# Altium PCB mach nuoi trong.PcbDoc
Units mil, origin at the board's own origin, x right, y up, seen from the top; angles counter-clockwise.
Board outline 3890 x 2890 mil, 2 copper layers (Top Layer, Bottom Layer); 37 components, 41 nets, 155 pads, 4 vias.
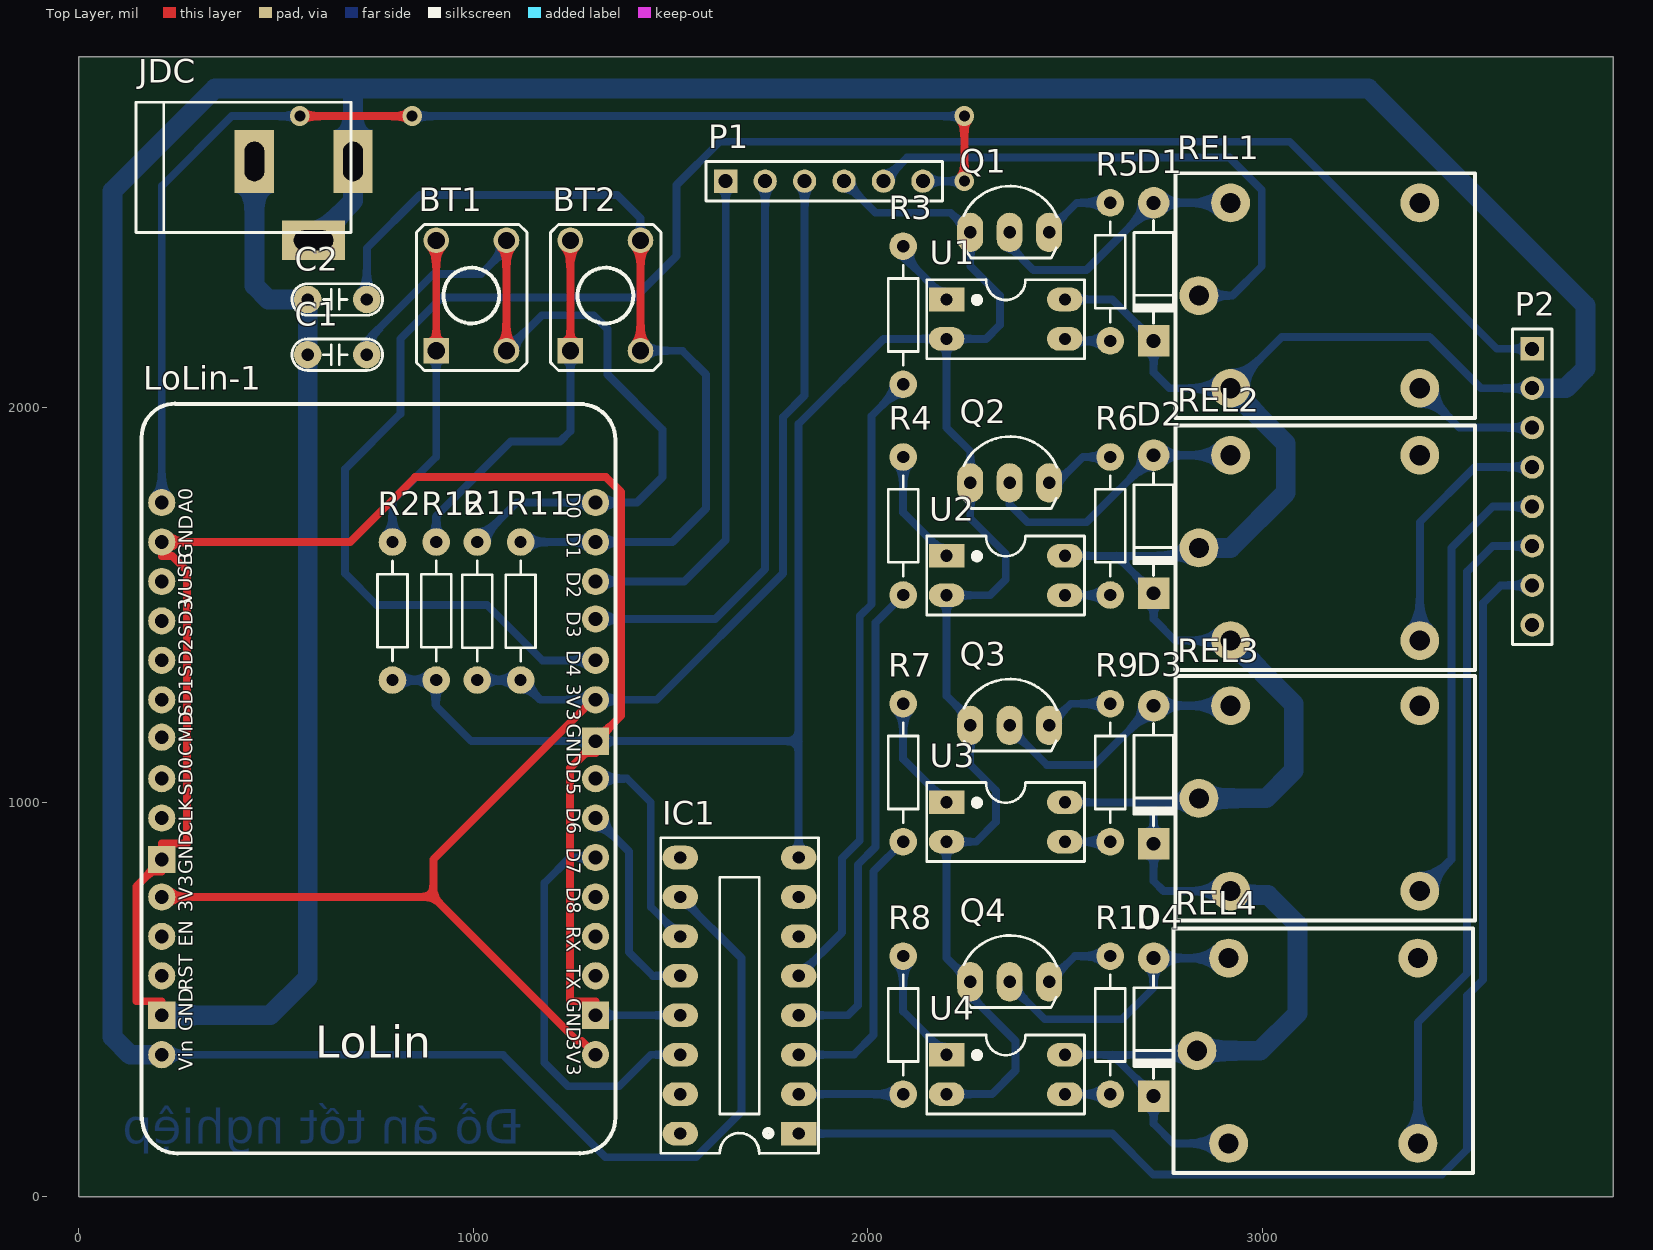
[diagram p0: Top Layer view]
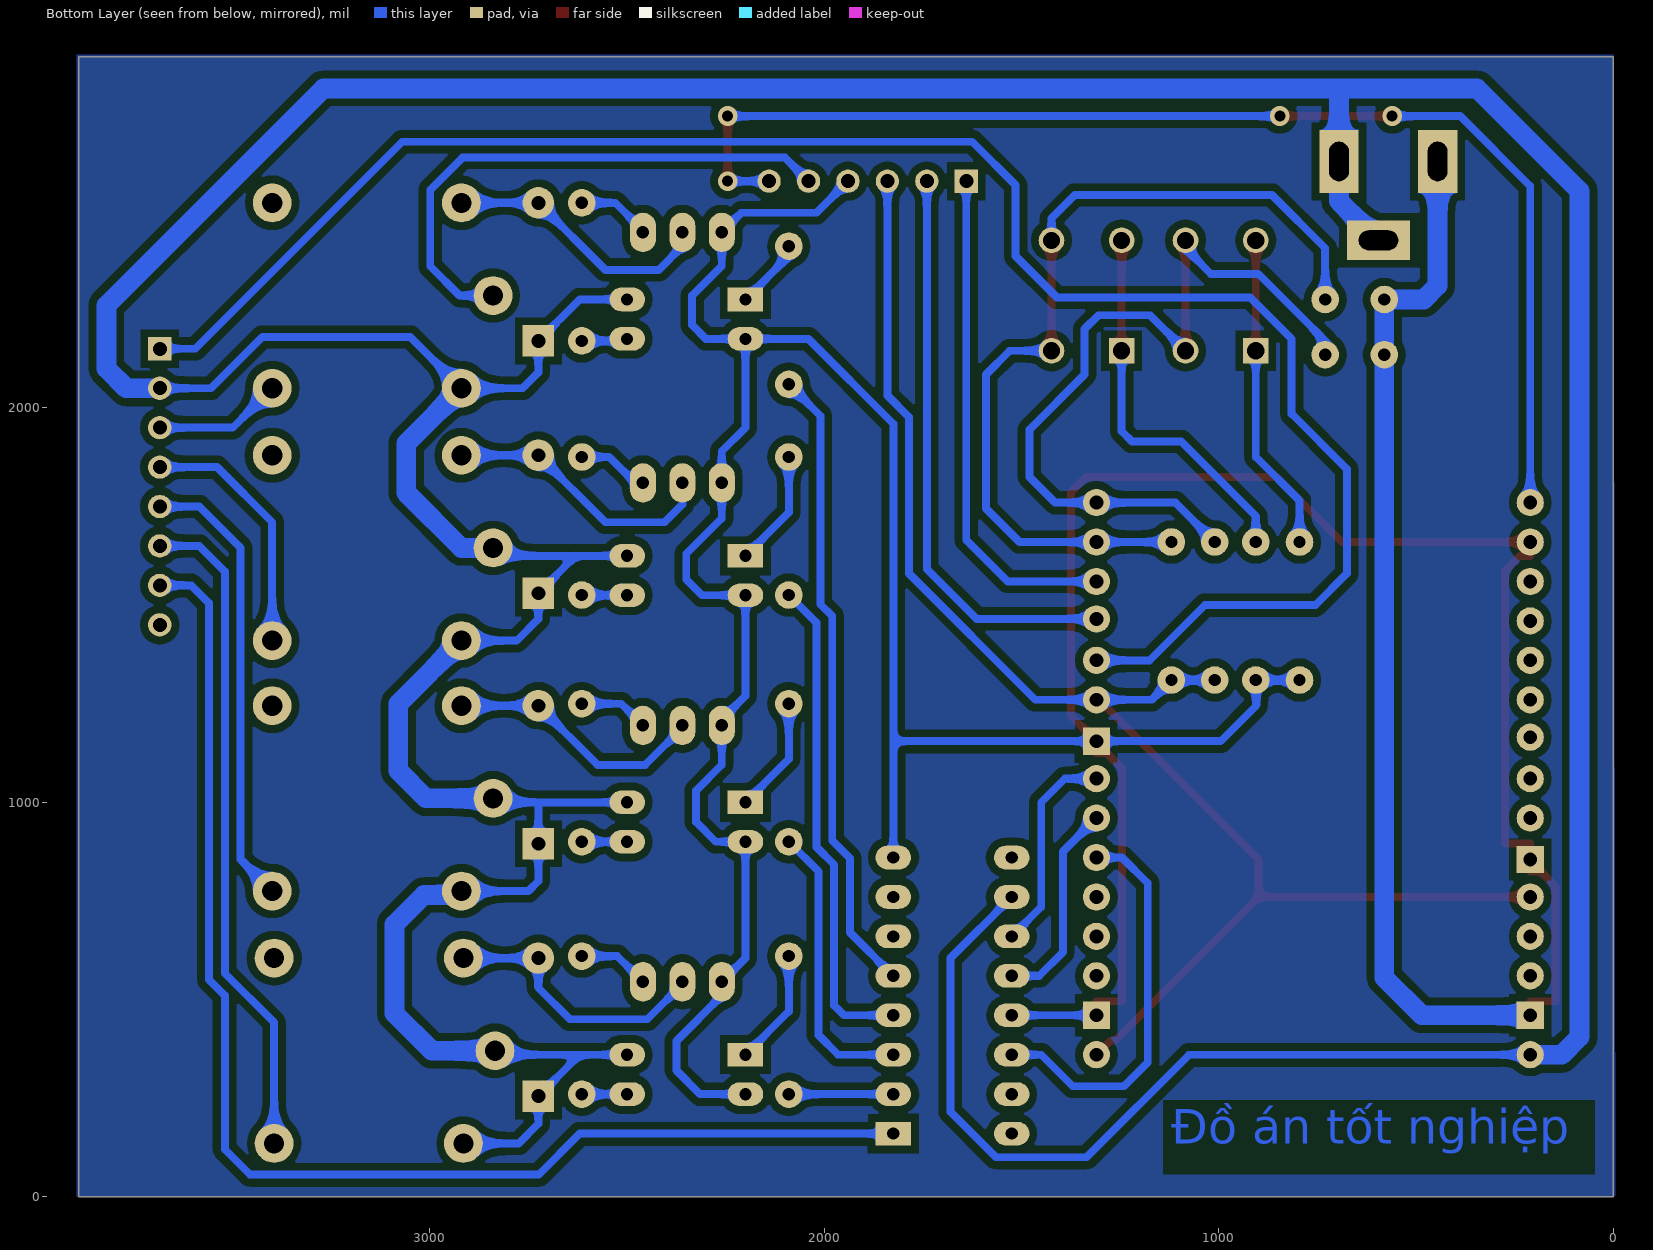
[diagram p1: Bottom Layer view, seen from below]
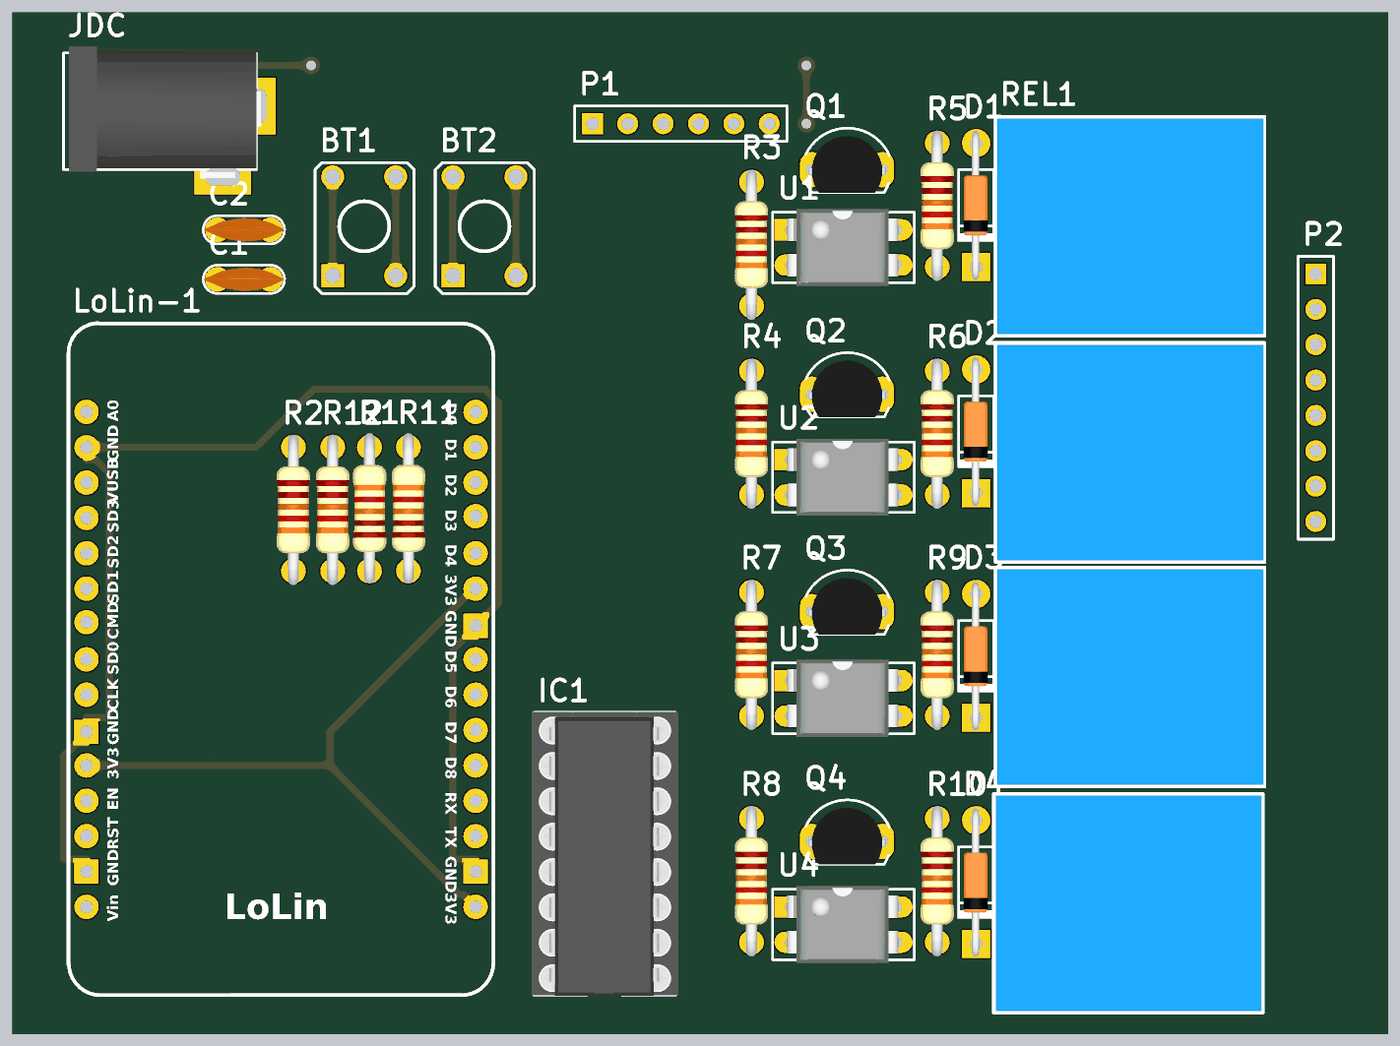
[diagram p2: 3D render of the assembled board from above, using the file's embedded part models]

## Layer stack, top to bottom
Top Solder: solder mask 0.4, Solder Resist, Dk 3.5
Top Layer: signal copper 1.4
Dielectric 1: dielectric 12.6, FR-4, Dk 4.8
Bottom Layer: signal copper 1.4
Bottom Solder: solder mask 0.4, Solder Resist, Dk 3.5

## Board outline
0,0 3890,0 3890,2890 0,2890

## Design rules (kind name [scope] priority, off if disabled: settings)
Clearance [All] p1: gap=20 ignorepadtopadclearanceinfootprint=FALSE
PolygonConnect [All] p1: connectstyle=Relief reliefconductorwidth=10 reliefentries=4 polygonreliefangle="90 Angle" airgapwidth=10
RoomDefinition sdnl [InComponentClass('sdnl')] p1: confinementstyle=ConfineIn formatcopy=TRUE lockcomponents=FALSE outline -8180,-4205 -6180,-4205 -6180,-3205 -8180,-3205
RoutingVias [All] p1: holewidth=20 width=35 viastyle="Through Hole" minholewidth=15 minwidth=25 maxholewidth=28 maxwidth=50
SolderMaskExpansion [All] p1: expansion=4
Width [All] p1: maxlimit=50 minlimit=10 preferedwidth=20
30 further rules are at their usual default settings.

## Components (designator, comment, footprint, x,y, rotation, side; value= is the part's Value field where it differs from the comment)
BT1 "BUTTON" "button 4 pin" 995,2285 r90 top
BT2 "BUTTON" "button 4 pin" 1335,2285 r90 top
C1 "103" CN1.5 580,2135 r0 top value=0.01uF
C2 "103" CN1.5 580,2275 r0 top value=0.01uF
D1 "1N4007" D1A 2725,2520 r90 top
D2 "1N4007" D1A 2725,1880 r90 top
D3 "1N4007" D1A 2725,1245 r90 top
D4 "1N4007" D1A 2725,605 r90 top
IC1 "74HC595" DIP16/W0.3 1825,160 r90 top
JDC "Jac DC" DC-IN 570,2525 r0 top
LoLin-1 "NodeMCU V1.0 ESP-12E_1" "LoLin NodeMcu V3" 259,2006 r0 top
P1 "Header 6" HDR1X6 1640,2575 r0 top
P2 "Header 8" HDR1X8 3685,2150 r270 top
Q1 "C1815" QTO-92 2360,2445 r0 top
Q2 "C1815" QTO-92 2360,1810 r0 top
Q3 "C1815" QTO-92 2360,1195 r0 top
Q4 "C1815" QTO-92 2360,545 r0 top
R1 "10k" R1/4W 1010,1660 r270 top value="R1/4W - 1K"
R2 "10k" R1/4W 795,1310 r90 top value="R1/4W - 1K"
R3 "1k" R1/4W 2090,2060 r90 top value="R1/4W - 1K"
R4 "1k" R1/4W 2090,1525.6 r90 top value="R1/4W - 1K"
R5 "1k" R1/4W 2615,2170 r90 top value="R1/4W - 1K"
R6 "1k" R1/4W 2615,1525.6 r90 top value="R1/4W - 1K"
R7 "1k" R1/4W 2090,900 r90 top value="R1/4W - 1K"
R8 "1k" R1/4W 2090,260 r90 top value="R1/4W - 1K"
R9 "1k" R1/4W 2615,900 r90 top value="R1/4W - 1K"
R10 "1k" R1/4W 2615,260 r90 top value="R1/4W - 1K"
R11 "10k" R1/4W 1120,1660 r270 top value="R1/4W - 1K"
R12 "10k" R1/4W 906,1310 r90 top value="R1/4W - 1K"
REL1 "RELAY 5V 10A" "RELAY 5V-10A" 2840,2285 r270 top
REL2 "RELAY 5V 10A" "RELAY 5V-10A" 2840,1645 r270 top
REL3 "RELAY 5V 10A" "RELAY 5V-10A" 2840,1010 r270 top
REL4 "RELAY 5V 10A" "RELAY 5V-10A" 2835,370 r270 top
U1 "PC817" DIP4 2200,2275 r270 top
U2 "PC817" DIP4 2200,1625 r270 top
U3 "PC817" DIP4 2200,1000 r270 top
U4 "PC817" DIP4 2200,360 r270 top

## Footprints (in the part's own frame and the unit in brackets; to place one, negate y for a bottom-side part, rotate by r counter-clockwise, add the part's x,y. Pads: shape width x height; smd on the part's side, far side on the other; paste and mask are expansions set on the pad)
"button 4 pin" [mil] "BUTTON SMORE 280mil x 178mil"
  rect 65x65 hole 43.31: 1(-140,89)
  round 65 hole 43.31: 1(140,89) 2(-140,-89) 2(140,-89)
  silkscreen extent -190,-141 180,139
CN1.5 [mil]
  round 70 hole 31: 1(0,0) 2(150,0)
  silkscreen extent -40,-40 190,40, body extent -40,-33 190,33, height 235
D1A [mil] "Diode 1A, W 100mil, L 350mil"
  round 80 hole 35: 1(0,0)
  rect 80x80 hole 35: 2(-350,0)
  silkscreen extent -305,-50 -45,50, body extent -386,-33 34,36, height 84
DC-IN [mil] "Jac DC input"
  rect 100x160 hole 50 slot 100 at 90 deg: 1(125,100) 2(-125,100)
  rect 160x100 hole 50 slot 100 at 0 deg: 3(25,-100)
  silkscreen extent -425,-80 120,250, body extent -410,-105 134,269, height 434
DIP4 [mil]
  rect 60x90 hole 31: 1(0,0)
  oval 60x90 hole 31: 2(100,0) 3(100,300) 4(0,300)
  silkscreen extent -50,-50 150,350, body extent -59,-10 159,305, height 170
DIP16/W0.3 [mil] "16 PIN, W 300mil, Pin to pin 100mil"
  rect 60x90 hole 31: 1(0,0)
  oval 60x90 hole 31: 2(100,0) 3(200,0) 4(300,0) 5(400,0) 6(500,0) 7(600,0) 8(700,0) 9(700,300) 10(600,300) 11(500,300) 12(400,300) 13(300,300) 14(200,300) 15(100,300) 16(0,300)
  silkscreen extent -50,-50 750,350, body extent -52,-57 752,356, height 299
HDR1X6 [mm] "Connector; Header; 6 Position"
  rect 1.5x1.5 hole 0.9: 1(0,0)
  round 1.5 hole 0.9: 2(2.54,0) 3(5.08,0) 4(7.62,0) 5(10.16,0) 6(12.7,0)
  silkscreen extent -1.27,-1.27 13.97,1.27
HDR1X8 [mm] "Connector; Header; 8 Position"
  rect 1.5x1.5 hole 0.9: 1(0,0)
  round 1.5 hole 0.9: 2(2.54,0) 3(5.08,0) 4(7.62,0) 5(10.16,0) 6(12.7,0) 7(15.24,0) 8(17.78,0)
  silkscreen extent -1.27,-1.27 19.05,1.27
"LoLin NodeMcu V3" [mil]
  round 69 hole 35: 3V3(-49,-1246) 3V3(1051,-1646) 3V3(1051,-746) A0(-49,-246) CLK(-49,-1046) CMD(-49,-841) D0(1051,-246) D1(1051,-346) D2(1051,-446) D3(1051,-541) D4(1051,-646) D5(1051,-946) D6(1051,-1046) D7(1051,-1146) D8(1051,-1246) EN(-49,-1346) GND(-49,-346) RST(-49,-1446) RX(1051,-1346) SD0(-49,-946) SD1(-49,-746) SD2(-49,-646) SD3(-49,-546) TX(1051,-1446) VIN(-49,-1646) VUSB(-49,-446)
  rect 69x69 hole 35: GND(-49,-1546) GND(-49,-1151) GND(1051,-1546) GND(1051,-851)
  silkscreen extent -100,-1896 1101,5
QTO-92 [mil] "TO-92"
  oval 66x100 hole 32: 1(-100,0) 2(0,0) 3(100,0)
  silkscreen extent -117,-65 120,118, body extent -109,-66 109,95, height 245
R1/4W [mil] "R 1/4W, 2 Pin, 350mil"
  round 70 hole 31: 1(0,0) 2(350,0)
  silkscreen extent 48,-38 302,38, body extent -40,-47 386,47, height 111
"RELAY 5V-10A" [mm]
  round 2.5 hole 1.3: 1(0,0) 2(-5.969,14.224) 3(5.969,14.224) 4(-5.969,2.032) 5(5.969,2.032)
  silkscreen extent -7.87,-1.52 7.87,17.78, body extent -7.75,-1.4 7.75,17.7, height 15.3

## Part data
BT1 BT2: library part "BUTTON 4 PIN"
C1 C2: library part CN1.5, "Cap np 682pF => 104pF"
D1 D2 D3 D4: library part D1A, "Diode 1A"
IC1: library part 74595, "8 Bit Serial input - Parallel Output"
JDC: library part DCIN, "Jac DC input"
LoLin-1: "LoLin NodeMCU V3"
P1: "Header, 6-Pin", LatestRevisionDate=17-Jul-2002, LatestRevisionNote="Re-released for DXP Platform.", Publisher="Altium Limited"
Q1 Q2 Q3 Q4: library part C1815_1, "NPN 600mW, ECB", =C2383
R1 R2 R3 R4 R5 R6 R7 R8 R9 R10 R11 R12: library part R1/4W, "Resistor 1/4W"
U1 U2 U3 U4: "Opto Couple", ComponentLink1Description="Digikey Part Link", ComponentLink2Description="Open Datasheet", ComponentLink2URL=H:\LIBRARY\LIBRARY.Datasheet\ds_PC817.pdf, Fc=80Khz, Published=13-April-2009, Publisher="Hoang Nguyen", Vendor=Digikey
P2: LatestRevisionDate=17-Jul-2002, LatestRevisionNote="Re-released for DXP Platform.", Publisher="Altium Limited"

## Via types
v1: diameter 50, hole 28, Top Layer to Bottom Layer, tented both sides, 4 vias

## Nets (pads, with @x,y where several pads share a name; then routed paths per layer and width w, separated by ;. In a path a pad name is that pad's centre, name@x,y a point inside that pad or via, vN(x,y) a via of type N, cw(c..) or ccw(c..) an arc to the next point about the centre after c; other vN are vias at no path point)
3v3: LoLin-1.3V3 P1.3 R1.2 R11.2 | length 3885.9
  Top Layer w20: LoLin-1.3V3@210,760 898.57,760 ; LoLin-1.3V3@1310,360 1274.5,395.5 1263.07,395.5 898.57,760 ; LoLin-1.3V3@1310,1260 1303.57,1260 898.57,855 898.57,760
  Bottom Layer w20: R1.2 R11.2 1170,1260 1310,1260 1465,1260 1785,1580 1785,1976.57 1840,2031.57 P1.3
5Vdc: D1.2 D2.2 D3.2 D4.2 IC1.10 JDC.1 JDC.3 LoLin-1.VIN P2.2 REL1.5 REL2.1 REL2.5 REL3.1 REL3.5 REL4.1 REL4.5 U1.4 U2.4 U3.4 U4.4 | length 15052.6
  Bottom Layer w20: LoLin-1.VIN 1075,360 1335,100 1564.85,100 1680,215.15 1680,605 IC1.10 ; U4.4 2620,360 ; U3.4 2720,1000 ; U2.4 2630,1625 ; U1.4 2620,2275 D1.2 2725,2090 2765,2050 REL1.5 3050,2180 3425,2180 3555,2050 P2.2 ; REL4.1 2825,360 2620,360 ; REL3.1 2830,1000 2720,1000 ; REL2.1 2820,1625 2630,1625 ; REL4.5 2775,135 2725,185 D4.2 2620,360 ; REL3.5@2920,765 REL3.5 2750,775 2725,800 D3.2 2725,995 2720,1000 ; REL2.5 2780,1410 2725,1465 D2.2 2630,1625
  Bottom Layer w50: LoLin-1.VIN 130,360 85,405 85,2550 345,2810 690,2810 ; JDC.3 695,2525 JDC.1 695,2805 690,2810 ; REL4.1 2995,370 3090,465 3090,690 3015,765 REL3.5@2920,765 ; REL3.1 3010,1010 3080,1080 3080,1250 REL2.5 ; REL2.1 2920,1645 3060,1785 3060,1910 REL1.5 ; P2.2 3770,2050 3820,2100 3820,2260 3270,2810 690,2810
A0: LoLin-1.A0 P1.6 | length 3181
  Top Layer w20: v1(560,2740) v1(845,2740) ; v1(2245,2575) v1(2245,2740)
  Bottom Layer w20: LoLin-1.A0 210,2562.43 387.57,2740 v1(560,2740) ; v1(845,2740) v1(2245,2740) ; P1.6 v1(2245,2575)
"BT CLEAN": BT1.2 C1.2 LoLin-1.D0 R1.1 | length 2066
  Top Layer w20: BT1.2@1084,2145 BT1.2@1084,2425
  Bottom Layer w20: C1.2 730,2170 900,2340 1020,2340 1084,2404 BT1.2@1084,2425 ; R1.1 1110,1760 LoLin-1.D0 1415,1760 1480,1825 1480,1945 1340,2085 1340,2200 1305,2235 1174,2235 BT1.2@1084,2145
"BT EAT": BT2.2 C2.2 LoLin-1.D1 R11.1 | length 2276.4
  Top Layer w20: BT2.2@1424,2145 BT2.2@1424,2425
  Bottom Layer w20: C2.2 730,2405 865,2540 1365,2540 1424,2481 BT2.2@1424,2425 ; R11.1 LoLin-1.D1 1505,1660 1590,1745 1590,2085 1530,2145 BT2.2@1424,2145
CLEAN: IC1.4 R4.1 | length 1248.6
  Bottom Layer w20: IC1.4 1950,460 1975,485 1975,841.57 2020,886.57 2020,1455.6 R4.1
CLK: IC1.11 LoLin-1.D5 | length 535.9
  Bottom Layer w20: LoLin-1.D5 1390,1060 1450,1000 1450,735 IC1.11
CON: IC1.12 LoLin-1.D6 | length 530.1
  Bottom Layer w20: LoLin-1.D6 1395,875 1395,620 1455,560 IC1.12
DAD: LoLin-1.D3 P1.2 | length 1465.9
  Bottom Layer w20: LoLin-1.D3 1613.43,1465 1740,1591.57 P1.2
DATA: IC1.14 LoLin-1.D7 | length 1014.9
  Bottom Layer w20: LoLin-1.D7 1245,860 1180,795 1180,340 1240,280 1370,280 1450,360 IC1.14
DHT11: LoLin-1.D2 P1.1 | length 1283.5
  Bottom Layer w20: LoLin-1.D2 1535,1560 1640,1665 P1.1
DIR: IC1.1 P2.7 | length 3310
  Bottom Layer w20: IC1.1 2620,160 2724.21,55.79 3455.79,55.79 3520,120 3520,510.01 3560,550.01 3560,1505 3605,1550 P2.7
DRIVER: LoLin-1.D4 P2.1 | length 4779.1
  Bottom Layer w20: LoLin-1.D4 1175,1360 1035,1500 755,1500 675,1580 675,1845 815,1985 815,2175 920,2280 1410,2280 1515,2385 1515,2565 1625,2675 3070,2675 3595,2150 P2.1
FAN: IC1.3 R7.1 | length 731.8
  Bottom Layer w20: IC1.3 1965,360 2015,410 2015,825 R7.1
GND: C1.1 C2.1 IC1.8 IC1.13 JDC.2 LoLin-1.GND P1.4 Q1.1 Q2.1 Q3.1 Q4.1 R2.1 R12.1 U1.2 U2.2 U3.2 U4.2 | length 12881.4
  Top Layer w20: LoLin-1.GND@210,460 210,495.5 145.5,495.5 145.5,786.72 183.28,824.5 210,824.5 210,855 210,895.5 274.5,895.5 274.5,1586.72 236.72,1624.5 210,1624.5 210,1660 688.08,1660 852.58,1824.5 1336.72,1824.5 1374.5,1786.72 1374.5,1219.5 1310,1155 1310,1124.5 1283.28,1124.5 1245.5,1086.72 1245.5,495.5 1310,495.5 LoLin-1.GND@1310,460
  Bottom Layer w20: R2.1 R12.1@905,1310 ; R12.1 R12.1@905,1310 ; LoLin-1.GND@1310,460 IC1.13 ; IC1.8 1825,1155 ; P1.4 2020,2495 2210,2495 Q1.1 2260,2360 2335,2285 2335,2210 2300,2175 U1.2 ; U4.2 2315,260 2375,320 2375,395 2260,510 Q4.1 2200,605 U3.2 2275,900 2325,950 2325,1030 2260,1095 Q3.1 2260,1210 2200,1270 U2.2 2310,1525 2350,1565 2350,1630 2260,1720 Q2.1 2260,1890 2200,1950 U1.2 ; R12.1@905,1310 905,1245 995,1155 1310,1155 1825,1155 ; 1825,1155 1825,1960 2040,2175 U1.2
  Bottom Layer w50: LoLin-1.GND@210,460 485,460 580,555 C1.1 C2.1 480,2275 445,2310 JDC.2
LIGHT: IC1.5 R3.1 | length 1609.8
  Bottom Layer w20: IC1.5 1935,670 1935,858.14 1980,903.14 1980,1472.17 2010,1502.17 2010,1980 R3.1
NetBT1_1: BT1.1 R2.2 | length 811
  Top Layer w20: BT1.1@906,2145 BT1.1@906,2425
  Bottom Layer w20: R2.2 795,1765 906,1876 BT1.1@906,2145
NetBT2_1: BT2.1 R12.2 | length 979.1
  Top Layer w20: BT2.1@1246,2145 BT2.1@1246,2425
  Bottom Layer w20: R12.2 906,1726 1095,1915 1220,1915 1246,1941 BT2.1@1246,2145
NetD1_1: D1.1 Q1.2 REL1.4 | length 690.3
  Bottom Layer w20: Q1.2 2360,2410 2420,2350 2555,2350 D1.1 REL1.4
NetD2_1: D2.1 Q2.2 REL2.4 | length 704.1
  Bottom Layer w20: Q2.2 2360,1755 2405,1710 2555,1710 D2.1 REL2.4
NetD3_1: D3.1 Q3.2 REL3.4 | length 667.1
  Bottom Layer w20: Q3.2 2360,1188.9 2453.9,1095 2575,1095 D3.1 REL3.4
NetD4_1: D4.1 Q4.2 REL4.4 | length 706.1
  Bottom Layer w20: Q4.2 2360,538.9 2448.9,450 2645,450 2725,530 D4.1 REL4.4
NetQ1_3: Q1.3 R5.2 | length 189
  Bottom Layer w20: Q1.3 2460,2450 2530,2520 R5.2
NetQ2_3: Q2.3 R6.2 | length 182.2
  Bottom Layer w20: Q2.3 2480,1810 2545.6,1875.6 R6.2
NetQ3_3: Q3.3 R9.2 | length 177.8
  Bottom Layer w20: Q3.3 2515,1250 R9.2
NetQ4_3: Q4.3 R10.2 | length 181.9
  Bottom Layer w20: Q4.3 2525,610 R10.2
NetR3_2: R3.2 U1.1 | length 190.6
  Bottom Layer w20: R3.2 2090,2385 U1.1 U1.1@2190,2275
NetR4_2: R4.2 U2.1 | length 296.2
  Bottom Layer w20: R4.2 2090,1735 U2.1
NetR5_1: R5.1 U1.3 | length 117.1
  Bottom Layer w20: U1.3 2505,2170 R5.1
NetR6_1: R6.1 U2.3 | length 115.2
  Bottom Layer w20: U2.3 2614.4,1525 R6.1
NetR7_2: R7.2 U3.1 | length 295.6
  Bottom Layer w20: R7.2 2090,1110 U3.1
NetR8_2: R8.2 U4.1 | length 295.6
  Bottom Layer w20: R8.2 2090,470 U4.1
NetR9_1: R9.1 U3.3 | length 115
  Bottom Layer w20: U3.3 R9.1
NetR10_1: R10.1 U4.3 | length 115
  Bottom Layer w20: U4.3 R10.1
O-CLN: P2.4 REL2.3 | length 643
  Bottom Layer w20: REL2.3 3400,1710 3540,1850 P2.4
O-FAN: P2.5 REL3.3 | length 1151.6
  Bottom Layer w20: REL3.3 3480,855 3480,1645 3585,1750 P2.5
O-LIG: P2.3 REL1.3 | length 326.4
  Bottom Layer w20: REL1.3 3500,1950 P2.3
O-WAT: P2.6 REL4.3 | length 1693.7
  Bottom Layer w20: REL4.3 3395,441.57 3520,566.57 3520,1585 3585,1650 P2.6
VCC: IC1.16
VIN-LIG: P1.5 REL1.1 | length 1361.7
  Bottom Layer w20: P1.5 2100,2635 2917.02,2635 2999.21,2552.81 2999.21,2359.21 2925,2285 REL1.1@2880,2285
WATER: IC1.2 R8.1 | length 265
  Bottom Layer w20: IC1.2 R8.1
pads on no net: IC1.6 IC1.7 IC1.9 IC1.15 LoLin-1.CLK LoLin-1.CMD LoLin-1.D8 LoLin-1.EN LoLin-1.RST LoLin-1.RX LoLin-1.SD0 LoLin-1.SD1 LoLin-1.SD2 LoLin-1.SD3 LoLin-1.TX LoLin-1.VUSB P2.8 REL1.2 REL2.2 REL3.2 REL4.2

## Polygon pours and split planes (outlines as drawn)
no net on Bottom Layer "Bottom Layer-No Net" (solid, pour order 0): 0,2895 3895,2895 3895,0 -5,0

## Other copper
Bottom Layer:
  text "Đồ án tốt nghiệp" at 1120,105 h150

## Text inside footprints (layer, text, board x,y; h text height)
LoLin-1: Top Overlay "LoLin" at 599,326 h140; Top Overlay "CLK" at 300,916 h60 r90; Top Overlay "SD0" at 300,1016.43 h60 r90; Top Overlay "SD1" at 300,1217.29 h60 r90; Top Overlay "SD2" at 300,1317.71 h60 r90; Top Overlay "SD3" at 300,1418.14 h60 r90; Top Overlay "VUSB" at 299,1501 h60 r90; Top Overlay "GND" at 300,1619 h60 r90; Top Overlay "A0" at 300,1733 h60 r90; Top Overlay "D5" at 1225,1085 h60 r270; Top Overlay "GND" at 1225,1199 h60 r270; Top Overlay "3V3" at 1225,1300.99 h60 r270; Top Overlay "D4" at 1225,1386 h60 r270; Top Overlay "D3" at 1225,1484.42 h60 r270; Top Overlay "D2" at 1225,1584.42 h60 r270; Top Overlay "D1" at 1225,1684.65 h60 r270; Top Overlay "D0" at 1225,1786 h60 r270; Top Overlay "CMD" at 300,1116.86 h60 r90; Top Overlay "D6" at 1225,985.88 h60 r270; Top Overlay "3V3" at 1225,400 h60 r270; Top Overlay "GND" at 1225,503.8 h60 r270; Top Overlay "TX" at 1225,587 h60 r270; Top Overlay "RX" at 1225,685.94 h60 r270; Top Overlay "D8" at 1225,784.89 h60 r270; Top Overlay "D7" at 1225,884.77 h60 r270; Top Overlay "Vin" at 300,319 h60 r90; Top Overlay "GND" at 300,419 h60 r90; Top Overlay "RST" at 300,522 h60 r90; Top Overlay "EN" at 300,634 h60 r90; Top Overlay "3V3" at 300,721 h60 r90; Top Overlay "GND" at 300,818 h60 r90